# Altium PCB PCB1.PcbDoc
Units mm, origin at the board's own origin, x right, y up, seen from the top; angles counter-clockwise.
Board outline 41.15 x 17.27 mm, 2 copper layers (Top Layer, Bottom Layer); 5 components, 4 nets, 12 pads, 0 vias.
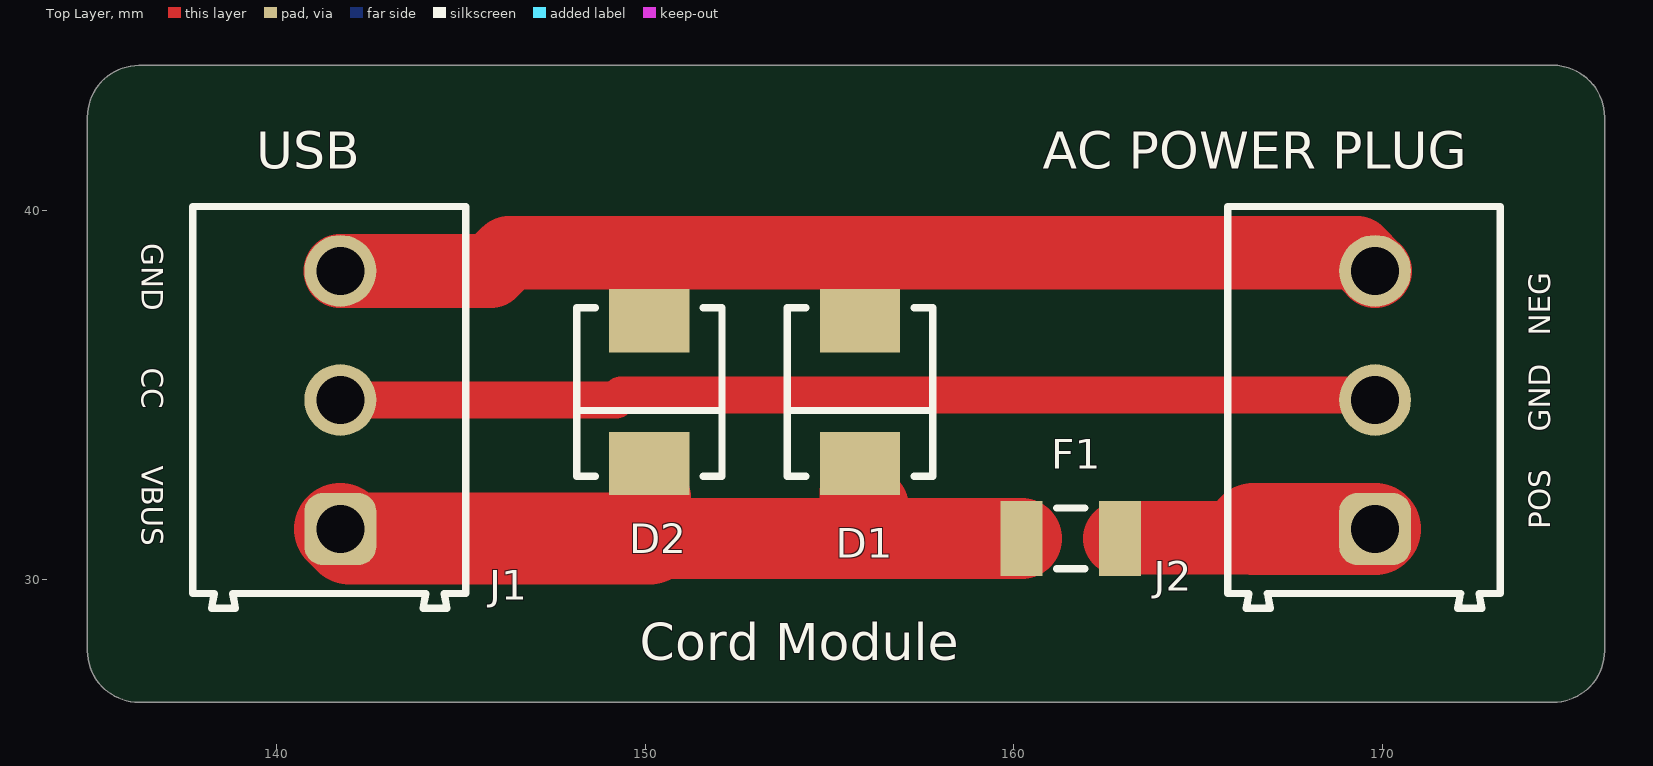
[diagram p0: Top Layer view]
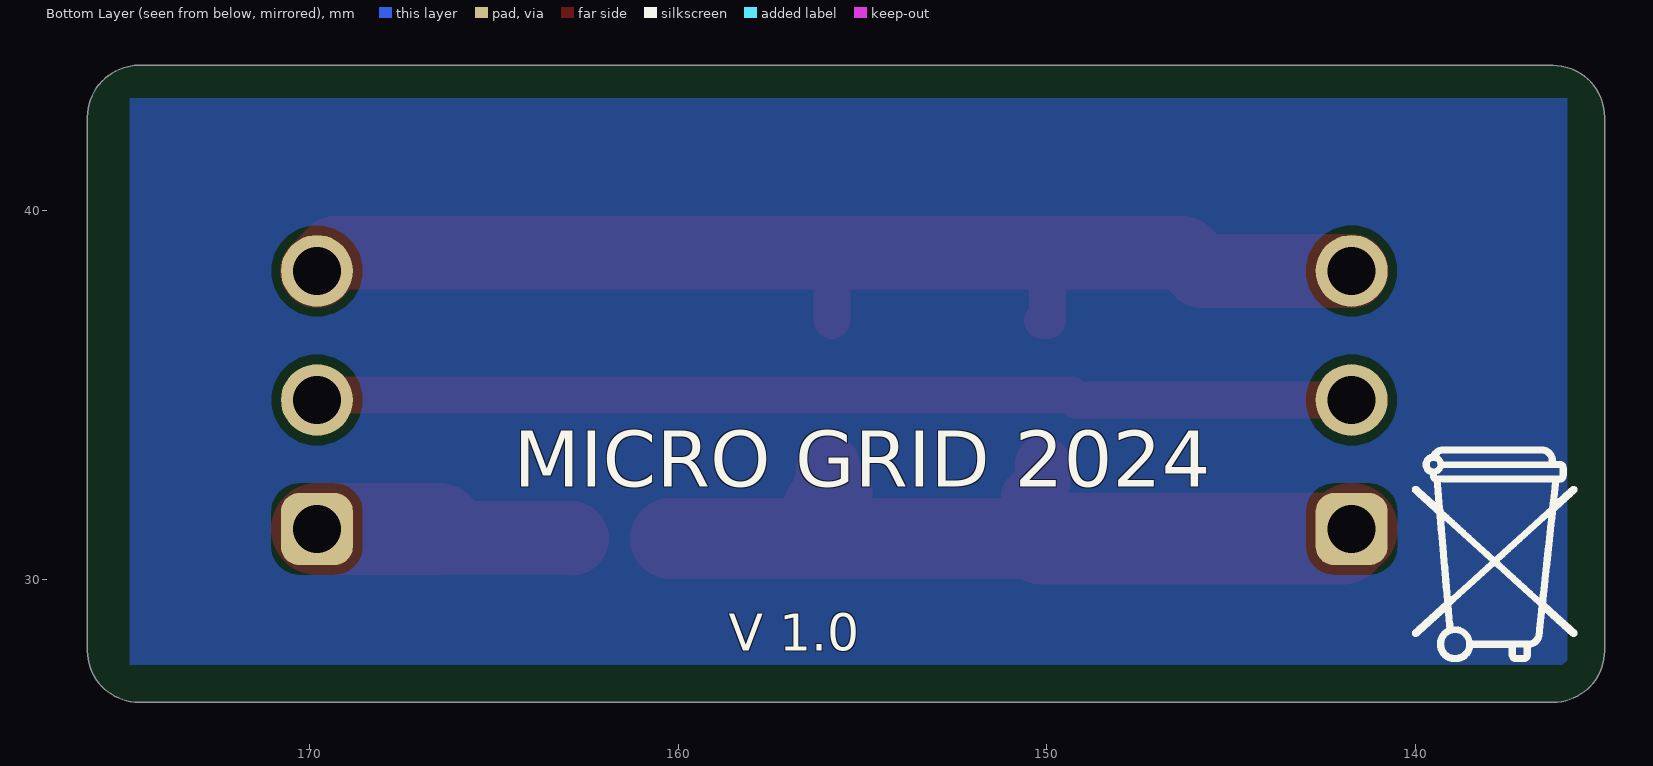
[diagram p1: Bottom Layer view, seen from below]
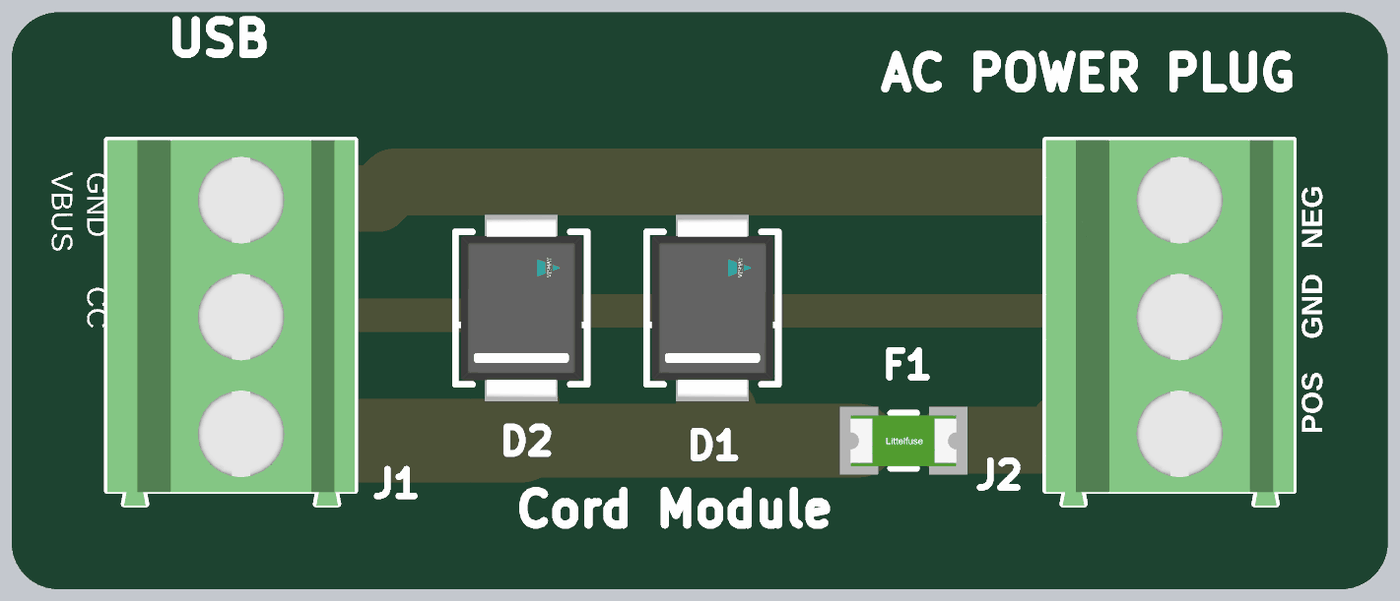
[diagram p2: 3D render of the assembled board from above, using the file's embedded part models]

## Layer stack, top to bottom
Top Solder: solder mask 0.0102, Solder Resist, Dk 3.5
Top Layer: signal copper 0.0356
Dielectric 1: dielectric 0.32, FR-4, Dk 4.8
Bottom Layer: signal copper 0.0356
Bottom Solder: solder mask 0.0102, Solder Resist, Dk 3.5

## Board outline
134.874,28.067 ccw(c136.271,28.067) 136.271,26.67 174.625,26.67 ccw(c174.625,28.067) 176.022,28.067 176.022,42.545 ccw(c174.625,42.545) 174.805,43.931 174.752,43.942 136.271,43.942 ccw(c136.271,42.545) 134.874,42.545

## Design rules (kind name [scope] priority, off if disabled: settings)
Clearance [All] p1: gap=0.254 ignorepadtopadclearanceinfootprint=FALSE
PolygonConnect [All] p1: connectstyle=Relief reliefconductorwidth=0.254 reliefentries=4 polygonreliefangle="90 Angle" airgapwidth=0.254
RoutingVias [All] p1: holewidth=0.711 width=1.27 viastyle="Through Hole" minholewidth=0.711 minwidth=1.27 maxholewidth=0.711 maxwidth=1.27
SolderMaskExpansion [All] p1: expansion=0.102 istentingtop=FALSE
Width [All] p1: maxlimit=3.5 minlimit=1 preferedwidth=2.5 minimp=50.000000 maximp=50.000000 favimp=50.000000
30 further rules are at their usual default settings.

## Classes and differential pairs
component class power_cord: D1 D2 F1 J1

## Components (designator, comment, footprint, x,y, rotation, side; value= is the part's Value field where it differs from the comment)
D1 "MURS160-E3/52T" FP-95401-MFG 155.829,35.084 r90 top
D2 "MURS160-E3/52T" FP-95401-MFG 150.114,35.084 r90 top
F1 "3A 32VAC/VDC" FP-0466-MFG 161.544,31.115 r0 top value=0.019Ω
J1 "TYPEC CONNECION" 691214110003 141.432,34.869 r90 top
J2 "POWER_CORD" 691214110003 169.499,34.869 r90 top

## Footprints (in the part's own frame and the unit in brackets; to place one, negate y for a bottom-side part, rotate by r counter-clockwise, add the part's x,y. Pads: shape width x height; smd on the part's side, far side on the other; paste and mask are expansions set on the pad)
691214110003 [mm] "3.50 mm Horizontal Entry Modular, 3p"
  rrect50% 1.95x1.95 hole 1.3: 1(-3.5,-0.3)
  round 1.95 hole 1.3: 2(0,-0.3) 3(3.5,-0.3)
  silkscreen extent -5.65,-3.7 5.25,3.7, body extent -5.7,-3.7 5.25,3.7, height 8.55
FP-0466-MFG [mil]
  rect 45x80 smd paste+0 mask+0: 1(-52.5,0) 2(52.5,0)
  silkscreen extent -15,-32 15,32, body extent -79,-44 79,44, height 10
FP-95401-MFG [mm]
  rect 1.716x2.18 smd paste+0 mask+0: 1(-1.937,0) 2(1.937,0)
  silkscreen extent -2.28,-1.97 2.28,1.97, body extent -2.9,-2.07 2.89,2.07, height 0.25

## Part data
D1 D2: library part CMP-02540-000056-1, "DIODE GEN PURP 600V 2A DO214AA", Average Rectified Current=2A, Case/Package=SMB, Current Rating=1A, Forward Voltage=1.25V, Max Forward Surge Current (Ifsm)=35A, Max Operating Temperature=175°C, Max Repetitive Reverse Voltage (Vrrm)=600V, Max Reverse Current=5uA, Min Operating Temperature=-65°C, Package Quantity=750, Element Configuration=Single, Forward Current=1A, Height=2.24mm, Lead Free="Lead Free", Length=4.57mm, Max Reverse Voltage (DC)=600V, Max Surge Current=35A, Mount="Surface Mount", Number of Pins=2, Output Current=1A, Packaging="Tape and Reel", Peak Non-Repetitive Surge Current=35A, Polarity=Standard, Radiation Hardening=No, Recovery Time=75ns, Reverse Recovery Time=75ns, Reverse Recovery Time-Max=50ns, Reverse Voltage=600V, Series=-, Voltage Rating (DC)=600V, Width=3.94mm
F1: library part CMP-08605-000054-1, "FUSE BOARD MNT 3A 32VAC/VDC 1206", Fuse Current=3A, Fuse Interrupt Ac Current=50A, Fuse Voltage Drop=75.99mV, Manufacturer=Littelfuse, Manufacturer Part Number=0466003.NR, Max Fuse Ac Voltage=32V, Package=0466, Resistance=0.019Ω, Temperature="-55°C to +90°C", Temperature Range High=+90°C, Temperature Range Low=-55°C, Automotive=No, Category=Fuse, ComponentLink2Description=Datasheet, ComponentLink2URL=https://www.littelfuse.com/~/media/electronics/datasheets/fuses/littelfuse_fuse_466_datasheet.pdf.pdf, Device Class L1="Circuit Protection", Device Class L2=Fuses, Device Class L3=unset, Digikey Description="FUSE BOARD MNT 3A 32VAC/VDC 1206", Fuse Blow Speed=Fast, Fuse I2T=0.576A2Sec, Fuse Interrupt Dc Current=50A, Height=0.66mm, Lead Free=Yes, Max Fuse Dc Voltage=32V, Mouser Description="Surface Mount Fuses 32V 3A VFA Slimline", Octopart=https://octopart.com/0466003.nr-littelfuse-565175, RoHS=TRUE, Voltage Rating=32V
J1 J2: library part CMP-1502-02466-2, Color="Blue, Green", Current=10A, Max Operating Temperature=105°C, Min Operating Temperature=-40°C, Voltage=300V, Contact Material=Brass, Contact Plating="Brass, Tin", Current Rating=10A, Height=12.2mm, Housing Material=Nylon, Lead Pitch=3.5mm, Length=7.4mm, Mount="Through Hole", NexarPartId=18818289, Number of Contacts=3, Number of Levels=1, Number of Pins=3, Number of Positions Per Level=3, Packaging=Box, Pitch=3.5052mm, Plating="Brass, Steel", REACH SVHC=Unknown, RoHS=Compliant, Stripping Length=-6mm, Termination=Screw, Voltage Rating=300V, Width=10.9mm, Wire Gauge (Max)=24AWG, Wire Gauge (Min)=16AWG, Wire/Cable Gauge=24AWG

## Nets (pads, with @x,y where several pads share a name; then routed paths per layer and width w, separated by ;. In a path a pad name is that pad's centre, name@x,y a point inside that pad or via, vN(x,y) a via of type N, cw(c..) or ccw(c..) an arc to the next point about the centre after c; other vN are vias at no path point)
AC_GND: J1.2 J2.2 | length 28.2
  Top Layer w1: J1.2 149.214,34.869 149.346,35.001 169.667,35.001 J2.2
AC_NEG: D1.2 D2.2 J1.3 J2.3 | length 33.3
  Top Layer w1: 149.987,39.243 149.987,37.022 D2.2 ; 155.575,39.243 155.829,39.243 D1.2
  Top Layer w2: J1.3 145.811,38.369 146.304,38.862 149.987,38.862 169.306,38.862 J2.3
AC_POS: F1.2 J2.1 | length 7.2
  Top Layer w2: F1.2 162.893,31.131 166.497,31.131 166.497,31.369
  Top Layer w2.5: 166.497,31.369 J2.1
USB_POSITIVE: D1.1 D2.1 F1.1 J1.1 | length 23.1
  Top Layer w1.5: 150.114,31.115 150.114,31.623 150.495,32.004 150.495,32.258 150.114,32.639 D2.1 ; D1.1 156.061,32.915 D1.1@156.061,32.594
  Top Layer w2.2: 150.114,31.115 156.579,31.115 ; D1.1@155.829,32.362 155.829,32.186 156.061,31.953 156.061,31.633 156.579,31.115 ; F1.1 156.579,31.115
  Top Layer w2.5: J1.1 141.986,31.115 150.114,31.115

## Polygon pours and split planes (outlines as drawn)
no net on Bottom Layer "NONET_L02_P000" (solid, pour order 0): 135.89,43.053 174.879,43.053 174.879,27.686 136.017,27.686 135.89,27.813

## Other copper
Top Layer:

## Silkscreen, mask and mechanical layers (free items; w line width, h text height)
Top Overlay:
  text "USB" at 139.446,41.148 h1
  text "AC POWER PLUG" at 160.782,41.148 h1
  text "GND      CC      VBUS" at 136.144,39.116 h1 r270
  text "POS    GND   NEG" at 174.752,31.369 h1 r90
  text "Cord Module" at 149.86,27.813 h1
Bottom Overlay:
  region: 2283 vertices and 9 holes, not listed, extent 135.617,27.763 140.09,33.605
  text "MICRO GRID 2024" at 164.465,32.512 h1.52
  text "V 1.0" at 158.623,28.067 h1
Mechanical 1:
  lines w0.254: 136.271,43.815 ccw(c136.271,42.545) 135.001,42.545 135.001,28.067 ccw(c136.271,28.067) 136.271,26.797 139.192,26.797 173.114,26.797 ; 136.398,43.815 174.752,43.815 ; 171.577,26.797 174.625,26.797 ccw(c174.625,28.067) 175.895,28.067 175.895,42.545 ccw(c174.625,42.545) 174.625,43.815 ; 175.895,29.219 175.895,40.653